# Altium PCB STC32G12k128.PcbDoc
Units mil, origin at the board's own origin, x right, y up, seen from the top; angles counter-clockwise.
Board outline 1653.54 x 1062.99 mil, 4 copper layers (Top Signal, GND, POWER, Bottom Signal), stack 23.756 mil thick; 19 components, 68 nets, 165 pads, 54 vias.
Unrouted connection lines stored in the file: 11.
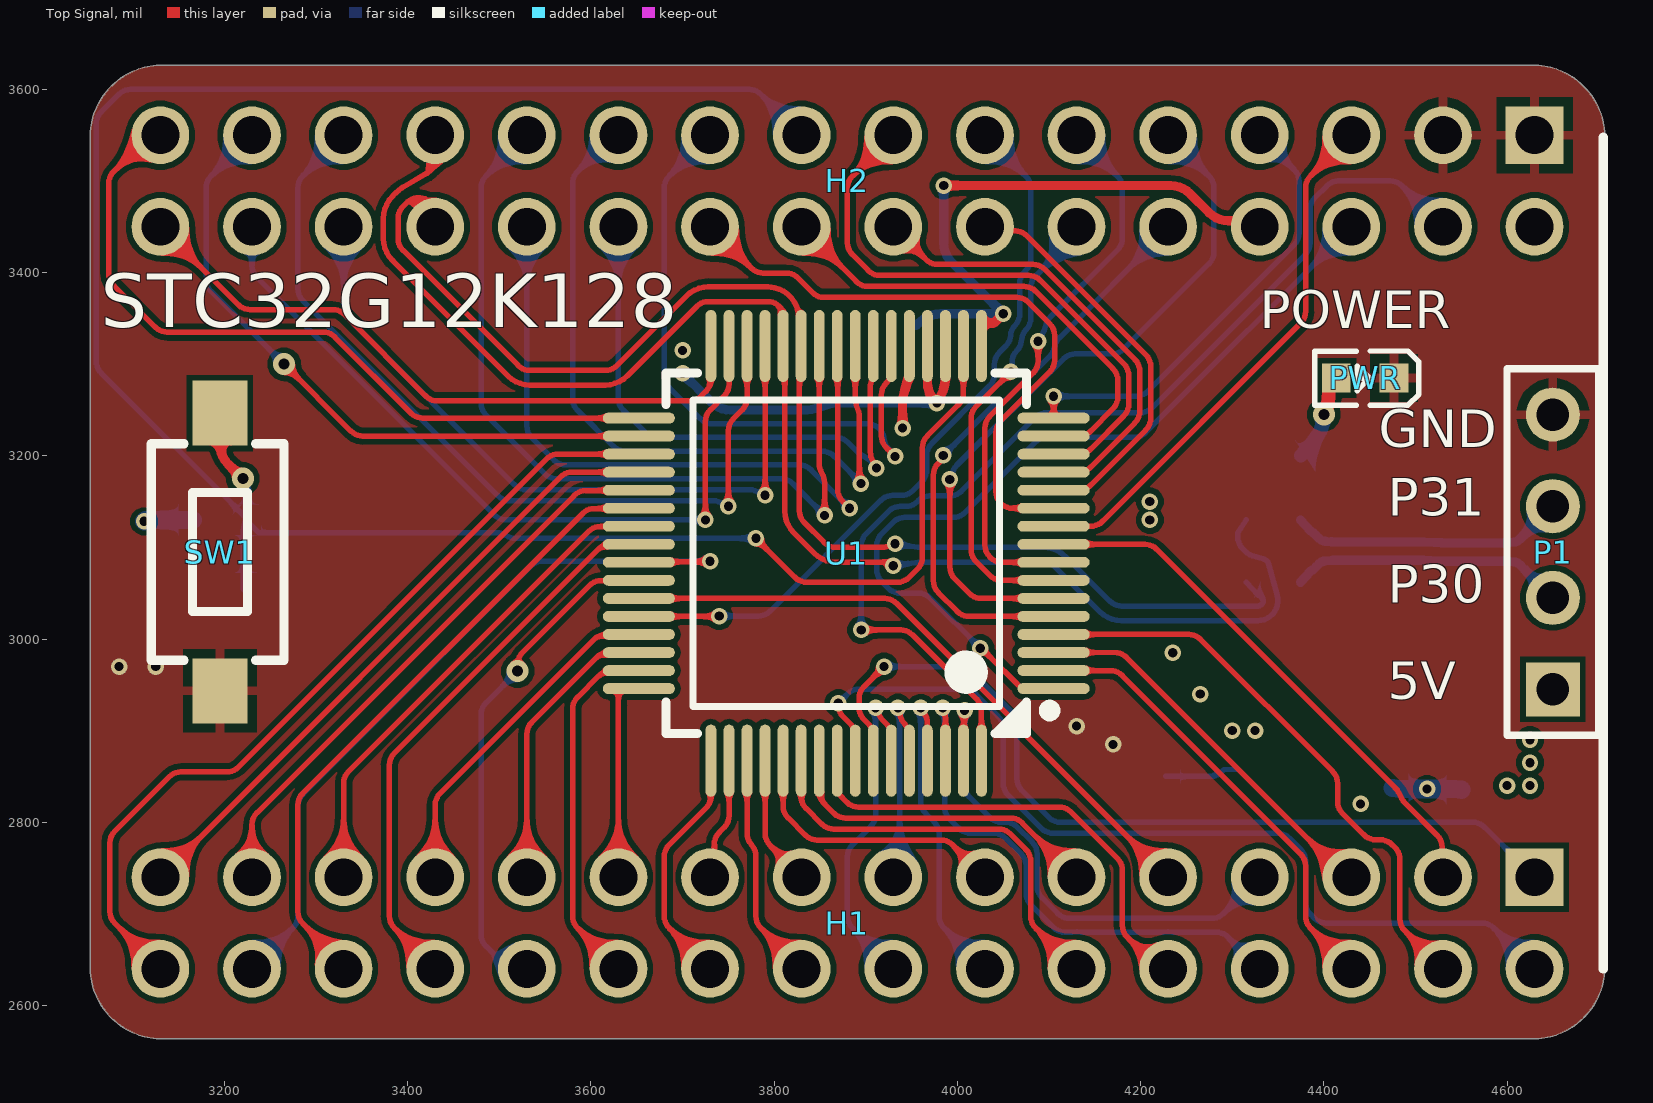
[diagram p0: Top Signal view]
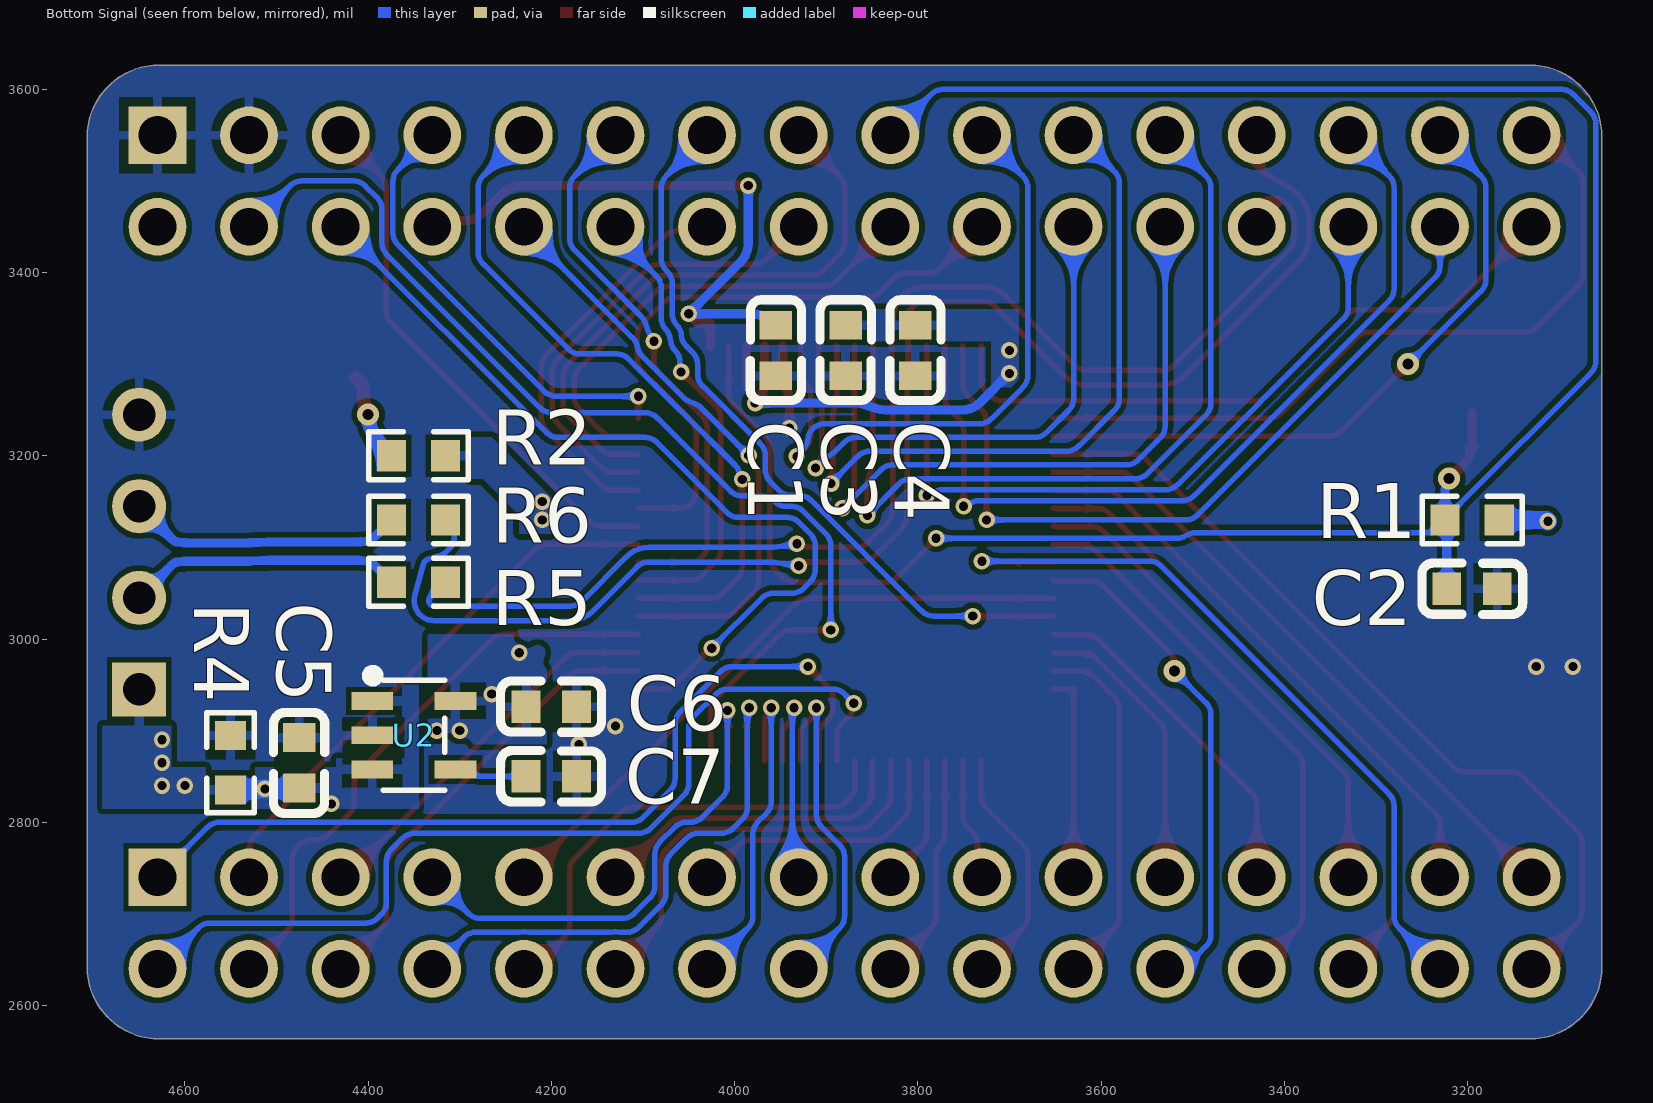
[diagram p1: Bottom Signal view, seen from below]
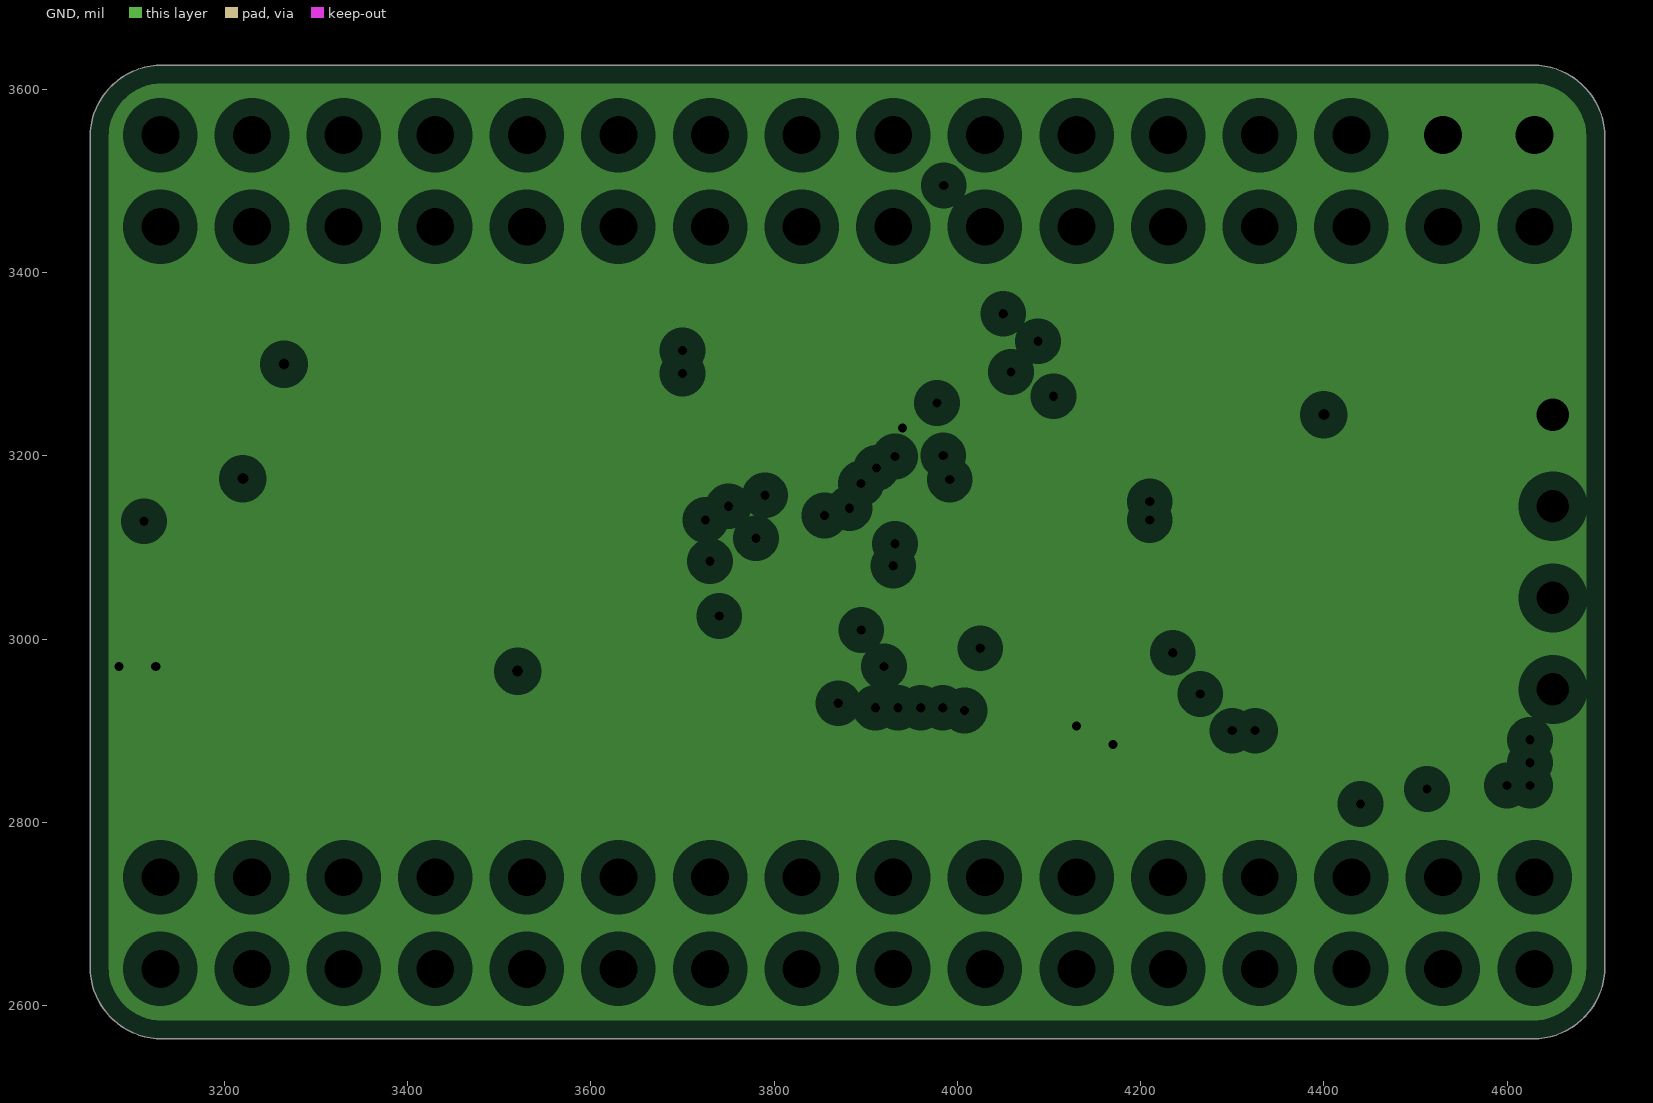
[diagram p2: GND, clearances drawn from the general rule]
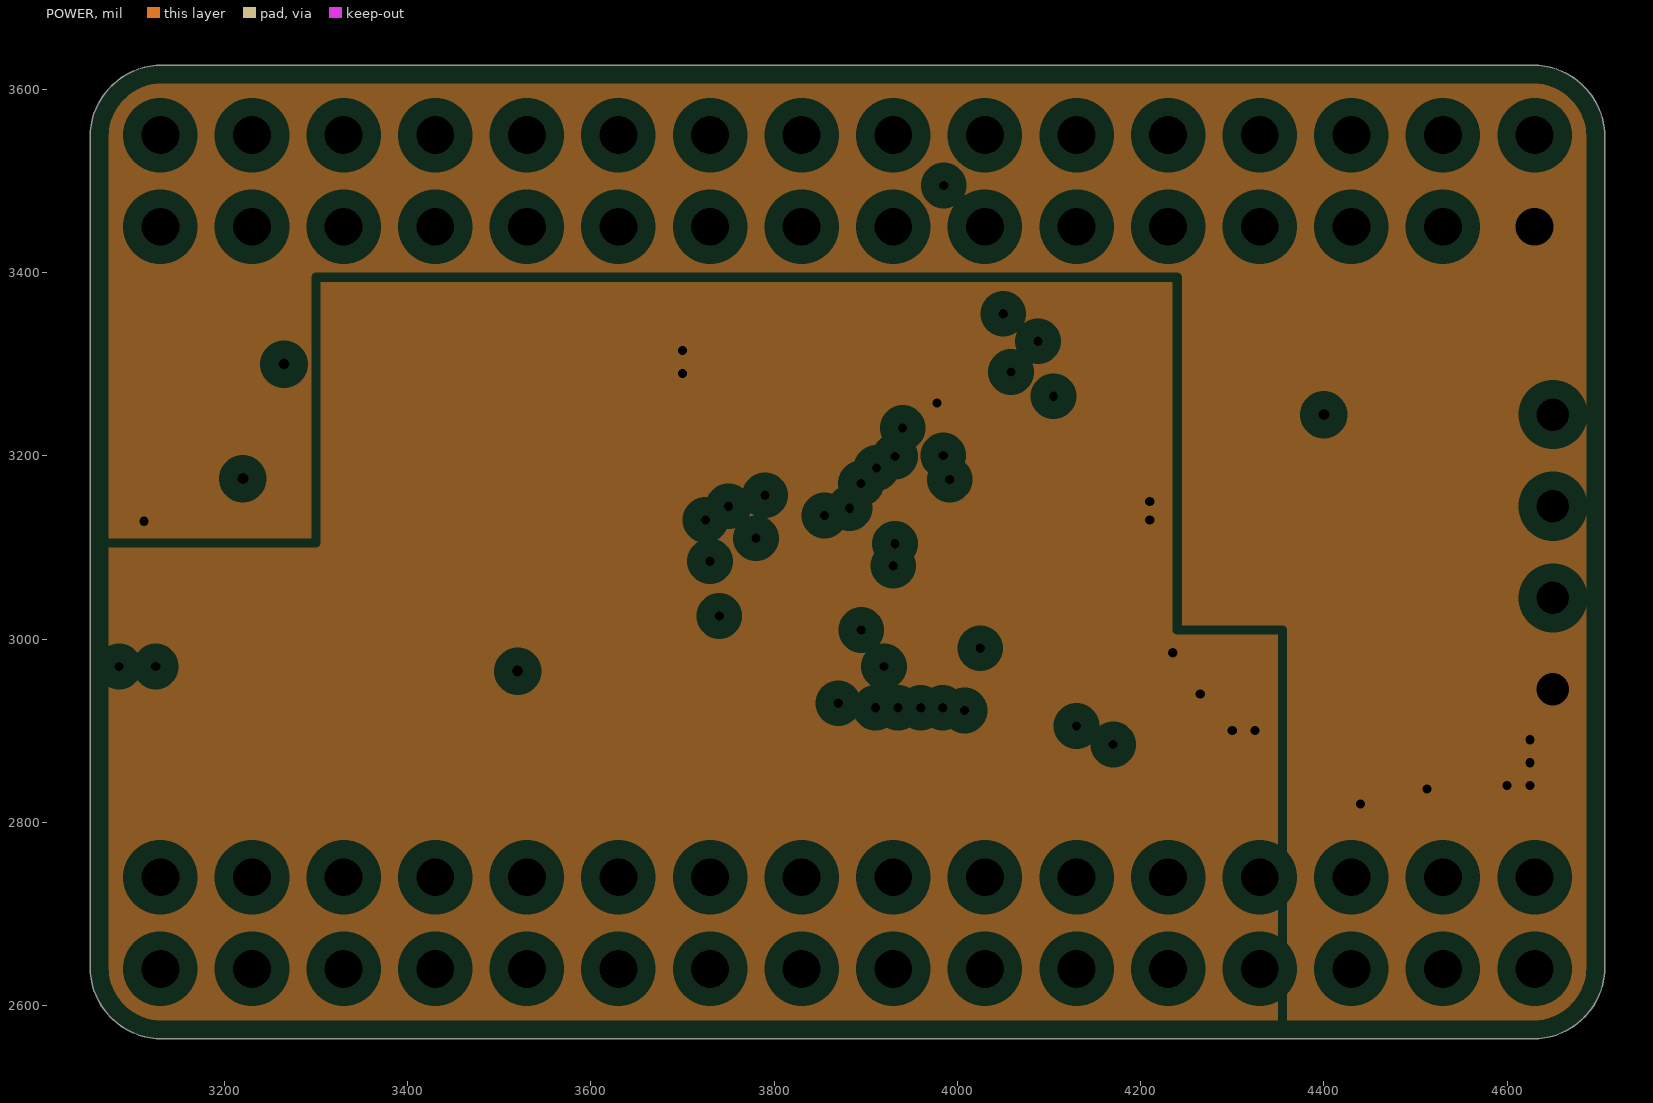
[diagram p3: POWER, clearances drawn from the general rule]

## Layer stack, top to bottom
Top Solder: solder mask 0.4, Solder Resist, Dk 3.5
Top Signal: signal copper 1.4
Dielectric 2: prepreg 2.8, PP-006, Dk 4.1
GND: plane copper 1.378, net GND
Dielectric 1: dielectric 12.6, FR-4, Dk 4.8
POWER: plane copper 1.378, net VCC
Dielectric 3: prepreg 2.8, PP-006, Dk 4.1
Bottom Signal: signal copper 1.4
Bottom Solder: solder mask 0.4, Solder Resist, Dk 3.5

## Board outline
3053.23,2642.24 ccw(c3131.97,2642.24) 3131.97,2563.5 4628.03,2563.5 ccw(c4628.03,2642.24) 4706.77,2642.24 4706.77,3547.76 ccw(c4628.03,3547.76) 4628.03,3626.5 3131.97,3626.5 ccw(c3131.97,3547.76) 3053.23,3547.76

## Design rules (kind name [scope] priority, off if disabled: settings)
Clearance [All] p1: gap=6 ignorepadtopadclearanceinfootprint=FALSE
DiffPairsRouting DiffPair_DiffPairsRouting [All] p1: maxlimit=10 minlimit=1 mostfreqgap=10 toplayer_minwidth=1 toplayer_maxwidth=15 toplayer_prefwidth=8 bottomlayer_minwidth=1 bottomlayer_maxwidth=15 bottomlayer_prefwidth=8 maxuncoupledlength=500
DiffPairsRouting DiffPair_DiffPairsRouting_1 [All] p2: maxlimit=10 minlimit=1 mostfreqgap=10 toplayer_minwidth=0 toplayer_maxwidth=15 toplayer_prefwidth=15 bottomlayer_minwidth=0 bottomlayer_maxwidth=15 bottomlayer_prefwidth=15 maxuncoupledlength=500
DiffPairsRouting DiffPair_DiffPairsRouting_2 [All] p3: maxlimit=10 minlimit=1 mostfreqgap=10 toplayer_minwidth=1 toplayer_maxwidth=15 toplayer_prefwidth=15 bottomlayer_minwidth=1 bottomlayer_maxwidth=15 bottomlayer_prefwidth=15 maxuncoupledlength=500
DiffPairsRouting DiffPair_DiffPairsRouting_3 [All] p4: maxlimit=10 minlimit=1 mostfreqgap=10 toplayer_minwidth=1 toplayer_maxwidth=15 toplayer_prefwidth=10 bottomlayer_minwidth=1 bottomlayer_maxwidth=15 bottomlayer_prefwidth=10 maxuncoupledlength=500
DiffPairsRouting DiffPair_DiffPairsRouting_4 [InDifferentialPair ('USB') Or InDifferentialPair ('USBUSB') Or InDifferentialPair ('NewDifferentialPair1')] p5: maxlimit=10 minlimit=10 mostfreqgap=10 toplayer_minwidth=5 toplayer_maxwidth=15 toplayer_prefwidth=10 bottomlayer_minwidth=5 bottomlayer_maxwidth=15 bottomlayer_prefwidth=10 maxuncoupledlength=500
DiffPairsRouting DiffPair_DiffPairsRouting_5 [All] p6: maxlimit=10 minlimit=10 mostfreqgap=10 toplayer_minwidth=1 toplayer_maxwidth=15 toplayer_prefwidth=10 bottomlayer_minwidth=1 bottomlayer_maxwidth=15 bottomlayer_prefwidth=10 maxuncoupledlength=500
DiffPairsRouting [All] p7: maxlimit=10 minlimit=10 mostfreqgap=10 toplayer_minwidth=15 toplayer_maxwidth=15 toplayer_prefwidth=15 bottomlayer_minwidth=15 bottomlayer_maxwidth=15 bottomlayer_prefwidth=15 maxuncoupledlength=500
HoleToHoleClearance [All] p1: gap=0 allowstackedmicrovias=TRUE
MatchedLengths DiffPair_MatchedLengths [All] p1: tolerance=3000 checknetsindiffpair=FALSE checkdiffpairvsdiffpair=TRUE checkxsignals=TRUE checkothers=TRUE
MatchedLengths DiffPair_MatchedLengths_1 [All] p2: tolerance=3000 checknetsindiffpair=FALSE checkdiffpairvsdiffpair=TRUE checkxsignals=TRUE checkothers=TRUE
MatchedLengths DiffPair_MatchedLengths_2 [All] p3: tolerance=3000 checknetsindiffpair=FALSE checkdiffpairvsdiffpair=TRUE checkxsignals=TRUE checkothers=TRUE
MatchedLengths DiffPair_MatchedLengths_3 [All] p4: tolerance=3000 checknetsindiffpair=FALSE checkdiffpairvsdiffpair=TRUE checkxsignals=TRUE checkothers=TRUE
MatchedLengths DiffPair_MatchedLengths_4 [InDifferentialPair ('USB') Or InDifferentialPair ('USBUSB') Or InDifferentialPair ('NewDifferentialPair1')] p5: tolerance=1000 checknetsindiffpair=FALSE checkdiffpairvsdiffpair=TRUE checkxsignals=TRUE checkothers=TRUE
MatchedLengths DiffPair_MatchedLengths_5 [All] p6: tolerance=1000 checknetsindiffpair=FALSE checkdiffpairvsdiffpair=TRUE checkxsignals=TRUE checkothers=TRUE
MinimumSolderMaskSliver [All] p1: minsoldermaskwidth=0
PlaneClearance [All] p1: clearance=20
PlaneConnect [All] p1: planeconnectstyle=Relief reliefexpansion=20 reliefentries=4 reliefconductorwidth=10 reliefairgap=10
PolygonConnect [All] p1: thpad.connectstyle=Relief thpad.reliefconductorwidth=10 thpad.reliefentries=4 thpad.polygonreliefangle="90 Angle" thpad.airgapwidth=10 smdpad.connectstyle=Relief smdpad.reliefconductorwidth=10 smdpad.reliefentries=4 smdpad.polygonreliefangle="90 Angle" smdpad.airgapwidth=10 via.connectstyle=Direct via.reliefconductorwidth=10 via.reliefentries=4 via.polygonreliefangle="90 Angle" via.airgapwidth=10
RoutingVias [All] p1: holewidth=12 width=24 viastyle="Through Hole" minholewidth=4 minwidth=10 maxholewidth=28 maxwidth=50
SilkToSilkClearance [All] p1: silktosilkclearance=0
SilkToSolderMaskClearance [IsPad] p1: minsilkscreentomaskgap=0 clearancetoexposedcopper=TRUE
SolderMaskExpansion [All] p1: expansion=4 istentingtop=FALSE
UnRoutedNet [All] p1: checkbadconnections=TRUE
Width [All] p1: maxlimit=20 minlimit=5 preferedwidth=10
22 further rules are at their usual default settings.

## Classes and differential pairs
differential pair NewDifferentialPair1: +P30 -P31
differential pair D_USB_: +USB_N -USB_P
differential pair USB: +USB_P -USB_N

## Components (designator, comment, footprint, x,y, rotation, side; value= is the part's Value field where it differs from the comment)
C1 "0.1uF" C0603 3955,3315 r270 bottom value=100nF
C2 "100nF" C0603 3195,3055 r0 bottom
C3 "22uF" C0603 3878.87,3315 r270 bottom value=100nF
C4 "0.1uF" C0603 3802.74,3315 r270 bottom value=100nF
C5 "1uF" C0603 4475.23,2865 r90 bottom value=100nF
C6 "1uF" C0603 4200,2926.13 r180 bottom value=100nF
C7 "22uF" C0603 4200,2850 r180 bottom value=100nF
H1 "X6521WV-2x16H-C60D30" HDR-TH_32P-2.54-V-M-R2-C16-S2.54 3880,2690 r180 top locked
H2 "X6521WV-2x16H-C60D30" HDR-TH_32P-2.54-V-M-R2-C16-S2.54 3880,3500 r180 top locked
P1 "Header 4" HDR1X4 4650,2945 r90 top
PWR "KT-0603R" LED0603-RD 4445,3285 r180 top (schematic designator LED1)
R1 "2.7k" R0603 3195,3130 r180 bottom value=4.7kΩ
R2 "100R" R0603 4345,3200 r0 bottom value=4.7kΩ
R4 "100k" R0603 4550.23,2865 r270 bottom value=4.7kΩ
R5 "22R" R0603 4345,3061.97 r180 bottom value=4.7kΩ
R6 "22R" R0603 4345,3130 r180 bottom value=4.7kΩ
SW1 "TS3625A" KEY-SMD_L6.0-W3.5-LS8.4 3195,3095 r90 top
U1 "STC32G12K128-35I-LQFP64" LQFP-64_L10.0-W10.0-P0.50-LS12.0-BL 3878.63,3093.58 r90 top locked
U2 "RT9013-33GB" SOT-23-5_L3.0-W1.7-P0.95-LS2.8-BL 4350,2895 r270 bottom

## Footprints (in the part's own frame and the unit in brackets; to place one, negate y for a bottom-side part, rotate by r counter-clockwise, add the part's x,y. Pads: shape width x height; smd on the part's side, far side on the other; paste and mask are expansions set on the pad)
C0603 [mm]
  rect 0.8x0.9 smd: 1(-0.7,0) 2(0.7,0)
  silkscreen extent -1.41,-0.71 1.39,0.72
HDR1X4 [mm] "Connector; Header; 4 Position"
  rect 1.5x1.5 hole 0.9: 1(0,0)
  round 1.5 hole 0.9: 2(2.54,0) 3(5.08,0) 4(7.62,0)
  silkscreen extent -1.27,-1.27 8.89,1.27
HDR-TH_32P-2.54-V-M-R2-C16-S2.54 [mm]
  rect 1.6x1.6 hole 1.05: 1(-19.05,-1.27)
  round 1.6 hole 1.05: 2(-19.05,1.27) 3(-16.51,-1.27) 4(-16.51,1.27) 5(-13.97,-1.27) 6(-13.97,1.27) 7(-11.43,-1.27) 8(-11.43,1.27) 9(-8.89,-1.27) 10(-8.89,1.27) 11(-6.35,-1.27) 12(-6.35,1.27) 13(-3.81,-1.27) 14(-3.81,1.27) 15(-1.27,-1.27) 16(-1.27,1.27) 17(1.27,-1.27) 18(1.27,1.27) 19(3.81,-1.27) 20(3.81,1.27) 21(6.35,-1.27) 22(6.35,1.27) 23(8.89,-1.27) 24(8.89,1.27) 25(11.43,-1.27) 26(11.43,1.27) 27(13.97,-1.27) 28(13.97,1.27) 29(16.51,-1.27) 30(16.51,1.27) 31(19.05,-1.27) 32(19.05,1.27)
KEY-SMD_L6.0-W3.5-LS8.4 [mm]
  rect 1.8x1.524 smd: 1(-3.85,0) 2(3.85,0)
  silkscreen extent -3,-1.78 3,1.91
LED0603-RD [mm]
  rect 0.8x0.8 smd: 1(-0.799,0) 2(0.799,0)
  silkscreen extent -1.49,-0.75 1.39,0.76
LQFP-64_L10.0-W10.0-P0.50-LS12.0-BL [mm]
  oval 0.3x2 smd: 1(-3.75,-5.75) 2(-3.25,-5.75) 3(-2.75,-5.75) 4(-2.25,-5.75) 5(-1.75,-5.75) 6(-1.25,-5.75) 7(-0.75,-5.75) 8(-0.25,-5.75) 9(0.25,-5.75) 10(0.75,-5.75) 11(1.25,-5.75) 12(1.75,-5.75) 13(2.25,-5.75) 14(2.75,-5.75) 15(3.25,-5.75) 16(3.75,-5.75) 33(3.75,5.75) 34(3.25,5.75) 35(2.75,5.75) 36(2.25,5.75) 37(1.75,5.75) 38(1.25,5.75) 39(0.75,5.75) 40(0.25,5.75) 41(-0.25,5.75) 42(-0.75,5.75) 43(-1.25,5.75) 44(-1.75,5.75) 45(-2.25,5.75) 46(-2.75,5.75) 47(-3.25,5.75) 48(-3.75,5.75)
  oval 2x0.3 smd: 17(5.75,-3.75) 18(5.75,-3.25) 19(5.75,-2.75) 20(5.75,-2.25) 21(5.75,-1.75) 22(5.75,-1.25) 23(5.75,-0.75) 24(5.75,-0.25) 25(5.75,0.25) 26(5.75,0.75) 27(5.75,1.25) 28(5.75,1.75) 29(5.75,2.25) 30(5.75,2.75) 31(5.75,3.25) 32(5.75,3.75) 49(-5.75,3.75) 50(-5.75,3.25) 51(-5.75,2.75) 52(-5.75,2.25) 53(-5.75,1.75) 54(-5.75,1.25) 55(-5.75,0.75) 56(-5.75,0.25) 57(-5.75,-0.25) 58(-5.75,-0.75) 59(-5.75,-1.25) 60(-5.75,-1.75) 61(-5.75,-2.25) 62(-5.75,-2.75) 63(-5.75,-3.25) 64(-5.75,-3.75)
  silkscreen extent -5,-5.79 5,5
R0603 [mil]
  rect 31.75x34.02 smd paste-3937.01 mask+2: 1(-29.66,0) 2(29.66,0)
  silkscreen extent -55,-26 55,26
SOT-23-5_L3.0-W1.7-P0.95-LS2.8-BL [mm]
  rect 0.49x1.157 smd: 1(-0.95,-1.154) 2(0,-1.154) 3(0.95,-1.154)
  rect 0.49x1.175 smd: 4(0.95,1.154) 5(-0.95,1.154)
  silkscreen extent -1.8,-1.29 1.53,0.85

## Part data
C1 C2 C3 C4 C5 C6 C7: library part CC0603KRX7R9BB104, JLCPCB Part Class="Basic Part", LCSC Part Name="100nF ±10% 50V", Manufacturer=YAGEO(国巨), Temperature Coefficient=X7R, Tolerance=±10%, Voltage Rated=50V, Add into BOM=yes, Convert to PCB=yes, Datasheet=https://atta.szlcsc.com/upload/public/pdf/source/20180910/C282072_33301C7F631E79921B82A8DAC6BCC5B3.pdf, Device=CC0603KRX7R9BB104, Manufacturer Part=CC0603KRX7R9BB104, Supplier=LCSC, Supplier Footprint=0603, Supplier Part=C14663, Symbol=CC0603KRX7R9BB104
H1 H2: Color=黑色, Current Rating (Max)=3A, JLCPCB Part Class="Extended Part", LCSC Part Name="2x16P 间距:2.54mm 方针", Manufacturer="XKB Connection(中国星坤)", Operating Temperature Range=-40℃~+105℃, Soldering Temperature(Max)=260℃, Voltage Rating (Max)=250V, Add into BOM=yes, Circluar Pins/Square Pins=方针, Contact Material=黄铜, Contact Plating=金, Convert to PCB=yes, Datasheet=https://atta.szlcsc.com/upload/public/pdf/source/20211009/DE33EBA4104B5B447A7BD8383FBBA145.pdf, Device=X6521WV-2x16H-C60D30, Insulation Height=2.5mm, Length of End Connection Pin=-, Length of Mating Pin=-, Manufacturer Part=X6521WV-2x16H-C60D30, Mounting Type=-, Number of Pins=32P, Number of Rows=双排, Pin Structure=2x16P, Pitch=2.54mm, Row Spacing=2.54mm, Supplier=LCSC, Supplier Footprint=插件,P=2.54mm, Supplier Part=C725888, Symbol=X6521WV-2×16H-C30D60
P1: "Header, 4-Pin", LatestRevisionDate=17-Jul-2002, LatestRevisionNote="Re-released for DXP Platform.", Publisher="Altium Limited"
PWR: Color Temperature=-, Emitted Color=红色, JLCPCB Part Class="Basic Part", LCSC Part Name="0603 红灯 高亮", Manufacturer=KENTO, Operating Temperature=-40℃~+85℃, Add into BOM=yes, Convert to PCB=yes, Datasheet=https://atta.szlcsc.com/upload/public/pdf/source/20160616/1466072038404.pdf, Device=KT-0603R, Diode Configuration=-, Dominant Wavelength=-, Forward Current=-, Lens Color=-, Manufacturer Part=KT-0603R, Mounting Sytle=-, Peak Wavelength=-, Power Dissipation=-, Supplier=LCSC, Supplier Footprint=0603, Supplier Part=C2286, Symbol=KT-0603R, Viewing Angle=-
R1 R2 R4 R5 R6: library part RC0603FR-074K7L, JLCPCB Part Class="Extended Part", LCSC Part Name="厚膜电阻 4.7kΩ ±1% 100mW", Manufacturer=YAGEO(国巨), Operating Temperature Range=-55℃~+155℃, Overload Voltage (Max)=75V, Power(Watts)=100mW, Temperature Coefficient=±100ppm/℃, Tolerance=±1%, Add into BOM=yes, Convert to PCB=yes, Datasheet=https://atta.szlcsc.com/upload/public/pdf/source/20180224/C181757_15194369480721363983.pdf, Device=RC0603FR-074K7L, Manufacturer Part=RC0603FR-074K7L, Supplier=LCSC, Supplier Footprint=0603, Supplier Part=C99782, Symbol=RC0603FR-074K7L, Type=厚膜电阻
SW1: Contact Current=50mA, JLCPCB Part Class="Extended Part", LCSC Part Name="6.1*3.65*2.5mm 立贴 轻触开关", Manufacturer="SHOU HAN(首韩)", Operating Force=250gf, Voltage Rating (DC)=12V, Actuator Style=矩形按钮, Add into BOM=yes, Circuit=单刀单掷, Convert to PCB=yes, Datasheet=https://atta.szlcsc.com/upload/public/pdf/source/20190620/C398053_EFFFB524A3F966B1F45EE8333D1EDECC.pdf, Device=TS3625A, Manufacturer Part=TS3625A, Mechanical Life=-, Mounting Style=立贴, Supplier=LCSC, Supplier Footprint=SMD, Supplier Part=C398053, Switch Height=2.5mm, Switch Length=6.1mm, Switch Width=3.65mm, Symbol=TS3625A, With Lamp=-
U1: JLCPCB Part Class="Extended Part", Manufacturer=STC(宏晶), Add into BOM=yes, Convert to PCB=yes, Datasheet=https://atta.szlcsc.com/upload/public/pdf/source/20230914/AA8E7D278420EC7FE3821FDFD9AB7FC5.pdf, Device=STC32G12K128-35I-LQFP64, LCSC Part Name=STC32G12K128-35I-LQFP64, Manufacturer Part=STC32G12K128-35I-LQFP64, Supplier=LCSC, Supplier Footprint=LQFP-64, Supplier Part=C5210761, Symbol=STC32G12K128-35I-LQFP64
U2: Dropout Voltage=400mV@(500mA), JLCPCB Part Class="Extended Part", LCSC Part Name="输入5.5V 输出3.3V 500mA", Manufacturer=RICHTEK(立锜), MAX Output Current=500mA, Maximum Input Voltage=5.5V, Operating Temperature=-40℃~+85℃, Output Voltage=3.3V, Power Supply Rejection Ratio (PSRR)=50dB@(10kHz), standby current=50uA, Add into BOM=yes, Convert to PCB=yes, Datasheet=https://atta.szlcsc.com/upload/public/pdf/source/20150504/1457707282459.pdf, Device=RT9013-33GB, Feature=-, Manufacturer Part=RT9013-33GB, Noise=-, Number of Outputs=1, Output Polarity=正极, Output Type=固定, Supplier=LCSC, Supplier Footprint=SOT-23-5, Supplier Part=C47773, Symbol=RT9013-33GB

## Via types
v1: diameter 18, hole 10, Top Signal to Bottom Signal, tented both sides, 50 vias
v2: diameter 24, hole 12, Top Signal to Bottom Signal, tented both sides, 4 vias

## Nets (pads, with @x,y where several pads share a name; then routed paths per layer and width w, separated by ;. In a path a pad name is that pad's centre, name@x,y a point inside that pad or via, vN(x,y) a via of type N, cw(c..) or ccw(c..) an arc to the next point about the centre after c; other vN are vias at no path point)
5V: C5.1 H2.2 P1.1 R1.2 R4.2 U2.1 U2.3 | length 128.8
  Bottom Signal w20: v1(3112.28,3128.5) 3113.79,3130 R1.2 ; C5.1 4482.95,2836.39 4543.22,2836.39 R4.2
  other v1: 4440,2820 4512.73,2836.39 4600,2840 4625,2840 4625,2865 4625,2890
GND: C1.2 C2.1 C3.2 C4.2 C5.2 C6.2 C7.2 H2.1 H2.3 P1.4 PWR.1 R4.1 SW1.1 U1.21 U2.2 | length 90.7
  Top Signal w10: v1(3940.23,3230.23) 3940.23,3259.44 cw(c3970.23,3259.44) 3941.61,3268.44 3945.82,3281.95 ccw(c3917.18,3290.91) 3947.18,3290.91 3947.18,3315.06 cw(c3977.18,3315.06) 3947.53,3319.59 U1.21
  other v1: 4170,2885 4130,2905 3085,2970 3125,2970
NetC7_1: C7.1 U2.4 | length 79.4
  Bottom Signal w6: C7.1 4276.04,2850 ccw(c4276.04,2868) 4288.77,2855.27 4291.1,2857.6 U2.4
NetLED1_2: PWR.2 R2.2 | length 97.4
  Top Signal w15: v2(4400,3245) ccw(c4360.28,3266.14) 4405.28,3266.05 4405.28,3276.75 PWR.2
  Bottom Signal w15: R2.2 4383.04,3209.51 4386.26,3212.74 ccw(c4354.43,3244.54) 4398.93,3237.87 4399.91,3244.44 cw(c4444.43,3237.84) v2(4400,3245)
P0: H1.16 U1.59 | length 379.6
  Top Signal w6: v1(3910.68,2925) 3910.72,2924.94 cw(c3894.99,2916.17) 3911.26,2923.87 3914.59,2916.85 ccw(c3930.89,2924.48) 3918.12,2911.8 3922.59,2907.32 cw(c3909.84,2894.62) 3924.18,2905.5 3927.84,2900.67 U1.59
  Bottom Signal w6: v1(3910.68,2925) 3910.68,2808.14 cw(c3892.68,2808.14) 3905.43,2795.43 3885.25,2775.25 ccw(c3898,2762.54) 3880,2762.54 3880,2697.46 ccw(c3898,2697.46) 3885.25,2684.75 H1.16
P1: H1.15 U1.60 | length 248.3
  Top Signal w6: v1@3935.06,2925 cw(c3919.33,2916.24) 3937,2919.68 3937.65,2916.34 ccw(c3955.33,2919.72) 3942.31,2907.29 3942.6,2906.99 cw(c3929.53,2894.61) 3943.86,2905.5 3947.53,2900.67 U1.60
  Bottom Signal w6: H1.15 cw(c3947.61,2736.27) 3932.93,2746.68 3933.7,2747.8 ccw(c3919,2758.18) 3937,2758.18 3937,2916.87 ccw(c3919,2916.87) v1(3935.04,2925.04)
P2: H1.14 U1.61 | length 371.3
  Top Signal w6: v1(3960,2925) ccw(c3976.81,2931.44) 3962.16,2920.98 3963.89,2918.54 cw(c3949.21,2908.12) 3967.21,2908.12 U1.61
  Bottom Signal w6: v1(3960,2925) 3960,2822.46 ccw(c3978,2822.46) 3965.25,2809.75 3974.75,2800.25 cw(c3962,2787.54) 3980,2787.54 3980,2697.46 ccw(c3998,2697.46) 3985.25,2684.75 H1.14
P3: H1.8 U1.62 | length 609.5
  Top Signal w6: v1(3984,2925) 3984.02,2924.92 ccw(c4001.44,2929.47) 3984.08,2924.7 3986.27,2916.69 cw(c3968.9,2911.95) 3986.9,2911.95 U1.62
  Bottom Signal w6: v1(3984,2925) cw(c3968.11,2916.55) 3986.11,2916.55 3986.11,2816.35 ccw(c4004.11,2816.35) 3991.36,2803.64 4001.75,2793.25 ccw(c4014.46,2806) 4014.46,2788 4039.54,2788 cw(c4039.54,2770) 4052.25,2782.75 4069.75,2765.25 cw(c4057,2752.54) 4075,2752.54 4075,2722.46 ccw(c4093,2722.46) 4080.25,2709.75 4104.75,2685.25 ccw(c4117.46,2698) 4117.46,2680 4122.46,2680 ccw(c4122.4,2698) 4124.73,2680.15 cw(c4130,2640) 4135.26,2680.15 4135.31,2680.15 ccw(c4137.6,2698) 4137.54,2680 4222.46,2680 ccw(c4222.4,2698) 4224.73,2680.15 cw(c4230,2640) 4235.26,2680.15 4235.31,2680.15 ccw(c4237.6,2698) 4237.54,2680 4282.54,2680 cw(c4282.54,2662) 4295.25,2674.75 H1.8
P4: H1.7 U1.63 | length 566.2
  Top Signal w6: U1.63 4006.58,2867.84 ccw(c3989.21,2872.54) 4007.21,2872.48 4007.21,2917.46 cw(c4025.21,2917.46) v1(4007.83,2922.17)
  Bottom Signal w6: v1(4007.83,2922.17) 4007.83,2840.29 ccw(c4025.83,2840.29) 4013.08,2827.58 4035.42,2805.25 ccw(c4048.12,2818) 4048.12,2800 4052.54,2800 cw(c4052.54,2782) 4065.25,2794.75 4081.75,2778.25 cw(c4069,2765.54) 4087,2765.54 4087,2730.46 ccw(c4105,2730.46) 4092.25,2717.75 4109.75,2700.25 ccw(c4122.46,2713) 4122.46,2695 4277.54,2695 ccw(c4277.54,2713) 4290.25,2700.25 H1.7
P5: H1.6 U1.2 | length 498.6
  Top Signal w6: U1.2 4166.91,2965.63 cw(c4166.91,2947.63) 4179.67,2960.33 4374.73,2765.27 cw(c4362,2752.54) 4380,2752.54 4380,2697.46 ccw(c4398,2697.46) 4382.63,2688.09 ccw(c4398,2697.46) 4385.25,2684.75 H1.6
P6: H1.5 U1.3 | length 425.1
  Top Signal w6: U1.3 4171.78,2985.31 cw(c4171.78,2967.31) 4184.51,2980.04 4419.32,2745.23 ccw(c4432.13,2757.87) H1.5
P7: H1.4 U1.4 | length 638.1
  Top Signal w6: U1.4 4252.54,3005 cw(c4252.54,2987) 4265.3,2999.7 4409.73,2855.27 cw(c4397,2842.54) 4415,2842.42 4415,2822.52 ccw(c4433,2822.46) 4420.25,2809.75 4443.81,2786.19 ccw(c4456.52,2798.94) 4456.52,2780.94 4461.6,2780.94 cw(c4461.6,2762.94) 4474.36,2775.64 4477.66,2772.34 cw(c4464.93,2759.61) 4482.93,2759.48 4482.93,2694.58 ccw(c4500.93,2694.52) 4488.18,2681.82 H1.4
P10: H1.3 U1.9 | length 599.1
  Top Signal w6: U1.9 4204.58,3103.42 cw(c4204.58,3085.42) 4217.33,3098.12 4478.08,2837.38 cw(c4465.35,2824.65) 4481.29,2833.01 4485.2,2825.55 ccw(c4501.2,2833.8) 4488.48,2821.07 4523.78,2785.77 cw(c4511.05,2773.04) 4529.05,2773.04 4529.05,2745.78 ccw(c4547.05,2745.78) H1.3
P11: H2.5 U1.10 | length 587.4
  Top Signal w6: U1.10 4145.65,3123.11 ccw(c4145.65,3141.11) 4158.35,3128.35 4374.75,3344.75 ccw(c4362,3357.46) 4380,3357.46 4380,3492.54 cw(c4398,3492.54) 4385.24,3505.24 H2.5
P13: H2.7 U1.16 | length 492.3
  Top Signal w6: U1.16 v1(4105,3265)
  Bottom Signal w6: v1(4105,3265) 4194.81,3265 ccw(c4194.81,3283) 4207.52,3270.25 4367.75,3430.48 ccw(c4355,3443.19) 4373,3443.19 4373,3499.54 ccw(c4355,3499.54) 4367.73,3512.27 H2.7
P14: H2.14 U1.12 | length 444.4
  Top Signal w6: H2.14 4030.06,3449.95 ccw(c4042,3463.42) 4042,3445.42 4063.04,3445.42 cw(c4063.04,3427.42) 4075.79,3440.12 4205.73,3310.18 cw(c4193,3297.46) 4211,3297.46 4211,3241.07 cw(c4193,3241.07) 4205.75,3228.37 4145.11,3167.73 cw(c4132.41,3180.48) 4143.29,3166.14 4138.46,3162.48 U1.12
P15: H2.16 U1.13 | length 504.8
  Top Signal w6: H2.16 3965.75,3414.25 ccw(c3978.46,3427) 3978.46,3409 4082.49,3409 cw(c4082.49,3391) 4095.24,3403.7 4193.73,3305.21 cw(c4181,3292.49) 4199,3292.49 4199,3248.76 cw(c4181,3248.76) 4193.75,3236.06 4145.1,3187.41 cw(c4132.4,3200.16) 4143.31,3185.85 4138.46,3182.16 U1.13
P16: H2.15 U1.14 | length 649.1
  Top Signal w6: H2.15 3885.25,3505.25 ccw(c3898,3492.54) 3880,3492.54 3880,3432.46 ccw(c3898,3432.46) 3885.25,3419.75 3902.78,3402.22 ccw(c3915.46,3415) 3915.46,3397 4077.51,3397 cw(c4077.51,3379) 4090.2,3391.77 4181.73,3300.24 cw(c4169,3287.51) 4187,3287.51 4187,3264.13 4187,3256.44 cw(c4169,3256.44) 4181.75,3243.74 4145.11,3207.1 cw(c4132.41,3219.85) 4143.29,3205.51 4138.46,3201.85 U1.14
P17: H2.18 U1.15 | length 525.7
  Top Signal w6: H2.18 3889.75,3390.25 ccw(c3902.46,3403) 3902.46,3385 4072.54,3385 cw(c4072.54,3367) 4085.3,3379.7 4169.73,3295.27 cw(c4157,3282.54) 4175,3282.54 4175,3264.13 cw(c4157,3264.13) 4169.75,3251.43 4145.09,3226.77 cw(c4132.4,3239.53) 4143.28,3225.19 4138.46,3221.53 U1.15
P20: H1.25 U1.45 | length 380.9
  Top Signal w6: H1.25 3430,2818.85 cw(c3448,2818.85) 3435.25,2831.56 3603.1,2999.41 cw(c3615.8,2986.65) 3615.8,3004.65 3648.4,3004.65 ccw(c3648.4,3022.65) 3651.89,3005 U1.45
P21: H1.23 U1.46 | length 318.1
  Top Signal w6: H1.23 3530,2896.22 cw(c3548,2896.22) 3535.25,2908.93 3606.04,2979.72 cw(c3618.74,2966.96) 3618.74,2984.96 3648.4,2984.96 ccw(c3648.4,3002.96) 3651.89,2985.31 U1.46
P22: H1.22 U1.47 | length 395.9
  Top Signal w6: H1.22 3585.25,2684.75 cw(c3598,2697.46) 3580,2697.46 3580,2923.6 cw(c3598,2923.6) 3585.25,2936.3 3608.98,2960.03 cw(c3621.69,2947.28) 3621.69,2965.28 3648.4,2965.28 ccw(c3648.4,2983.28) 3651.89,2965.63 U1.47
P23: H1.21 U1.48 | length 228.2
  Top Signal w6: H1.21 3630,2927.94 ; 3630,2927.98 3630.04,2945.88 ccw(c3612.04,2945.96) 3630.04,2945.94 U1.48
P24: H1.20 U1.49 | length 266.7
  Top Signal w6: H1.20 3685.25,2684.75 cw(c3698,2697.46) 3680,2697.46 3680,2762.54 cw(c3698,2762.54) 3685.25,2775.25 3725.74,2815.74 ccw(c3712.99,2828.45) 3730.99,2828.45 U1.49
P25: H1.19 U1.50 | length 133.5
  Top Signal w6: H1.19 ccw(c3716.61,2752.03) 3734.61,2751.97 3734.61,2776.04 cw(c3752.61,2776.04) 3739.86,2788.74 3745.43,2794.32 ccw(c3732.68,2807.02) 3750.68,2807.02 U1.50
P26: H1.18 U1.51 | length 249.6
  Top Signal w6: U1.51 3770.36,2787.82 ccw(c3788.36,2787.82) 3774.8,2775.97 3775.6,2775.06 cw(c3762,2763.26) 3780,2763.26 3780,2697.46 ccw(c3798,2697.46) 3785.25,2684.75 H1.18
P27: H1.17 U1.52 | length 142.9
  Top Signal w6: U1.52 3790.05,2787.92 ccw(c3808.05,2787.92) 3795.34,2775.18 3827.7,2742.82 cw(c3814.97,2730.09) H1.17
P30: H2.26 R5.2 U1.27 | length 1446.5
  Top Signal w6: H2.26 3430,3463.81 ccw(c3412,3463.81) 3399.3,3476.57 3394.75,3472.02 ccw(c3407.5,3459.32) 3389.5,3459.32 3389.5,3437.16 ccw(c3407.5,3437.16) 3394.75,3424.46 3520.67,3298.54 ccw(c3533.38,3311.29) 3533.38,3293.29 3615.59,3293.29 ccw(c3615.59,3311.29) 3628.29,3298.54 3704.16,3374.4 cw(c3728.16,3350.32) 3728.16,3384.32 3792.84,3384.32 cw(c3792.84,3350.32) 3800.25,3383.5 cw(c3792.84,3350.32) 3826.79,3352.25 3828.32,3326.29 ccw(c3846.28,3327.39) 3829.42,3321.1 3829.42,3318.84 ccw(c3846.29,3312.55) 3828.29,3312.97 3827.58,3276.53 ccw(c3845.57,3276.18) 3827.58,3276.18 3827.57,3139.88 ccw(c3845.57,3139.88) 3832.82,3127.18 3854.75,3105.25 ccw(c3867.46,3118) 3867.46,3100 3917.69,3100 ccw(c3917.69,3118) 3922.31,3100.6 3924.47,3101.18 ccw(c3919.91,3118.59) 3926.6,3101.88 v1(3931.88,3104)
  Bottom Signal w6: v1(3931.88,3104) ccw(c3937.8,3121) 3935.37,3103.16 3957.4,3100.16 ccw(c3959.83,3118) 3959.83,3100 4093.79,3100 cw(c4093.79,3066) 4117.9,3089.98 4166.66,3041.21 ccw(c4179.37,3053.97) 4179.37,3035.97 4298.72,3035.97 4327.77,3035.98 ccw(c4327.77,3041.98) R5.2@4328.25,3047.96 ; R5.2 R5.2@4328.22,3047.97
P31: H2.25 R6.2 U1.28 | length 1619.9
  Top Signal w6: 3383.47,3483.36 ccw(c3407.5,3459.32) 3373.5,3459.32 3373.5,3437.16 ccw(c3407.5,3437.16) 3383.38,3413.2 3509.37,3287.21 3509.41,3287.17 ccw(c3533.38,3311.29) 3533.38,3277.29 3615.59,3277.29 ccw(c3615.59,3311.29) 3639.6,3287.21 3715.46,3363.07 cw(c3728.16,3350.32) 3728.16,3368.32 3792.84,3368.32 cw(c3792.84,3350.32) 3810.84,3350.32 3810.84,3327.29 cw(c3792.84,3327.34) 3809.73,3321.11 3809.73,3318.7 cw(c3792.87,3312.46) 3810.86,3312.81 3811.57,3276.53 cw(c3793.57,3276.18) 3811.57,3276.18 3811.57,3139.88 ccw(c3845.57,3139.88) 3821.46,3115.92 3843.49,3093.88 ccw(c3867.46,3118) 3867.46,3084 3917.69,3084 cw(c3917.69,3066) 3922.29,3083.4 3925.19,3082.63 cw(c3923.69,3076.82) 3926.82,3081.94 v1(3930,3080) ; 3383.49,3483.39 3388,3487.9 cw(c3412,3463.81) 3392.76,3491.85 cw(c3412,3463.81) 3394.75,3493.11 3421.13,3508.65 ccw(c3412,3524.16) 3430,3524.16 H2.25
  Bottom Signal w6: v1(3930,3080) 3957.73,3083.83 cw(c3960.2,3066) 3960.2,3084 4093.79,3084 cw(c4093.79,3066) 4106.56,3078.69 4155.32,3029.92 ccw(c4179.37,3053.97) 4179.37,3019.97 4298.72,3019.97 4327.63,3019.98 ccw(c4327.77,3041.98) 4349,3047.73 4339.9,3081.33 ccw(c4331.22,3078.98) 4333.75,3087.62 4322.04,3091.05 cw(c4327.1,3108.32) 4314.4,3095.57 4311.26,3098.7 cw(c4324.04,3111.39) 4306.04,3111.39 4306.04,3115.99 R6.2
P32: H2.28 U1.29 | length 797.2
  Top Signal w6: v1(3790,3157) 3790,3177.05 cw(c3808,3177.05) 3790,3177.29 3790.02,3178.64 ccw(c3772.03,3178.92) 3790.03,3178.92 U1.29@3790.03,3319.03 ; U1.29@3790.03,3319.03 cw(c3808.03,3318.98) U1.29@3790.05,3319.92
  Bottom Signal w6: H2.28 3330,3362.46 ccw(c3348,3362.46) 3335.25,3349.75 3516.75,3168.25 ccw(c3529.46,3181) 3529.46,3163 3773.3,3163 cw(c3773.3,3145) 3781.72,3160.91 3786.4,3158.45 ccw(c3794.88,3174.32) 3789.95,3157.01 v1(3790,3157)
P33: H2.27 U1.30 | length 939.2
  Top Signal w6: v1(3750,3145) 3750,3227.54 cw(c3768,3227.54) 3755.25,3240.25 3765.11,3250.11 ccw(c3752.36,3262.82) 3770.36,3262.82 U1.30
  Bottom Signal w6: H2.27 3285.24,3505.24 ccw(c3298,3492.54) 3280,3492.54 3280,3382.46 ccw(c3298,3382.46) 3285.25,3369.75 3498.75,3156.25 ccw(c3511.46,3169) 3511.46,3151 3733.3,3151 cw(c3733.3,3133) 3741.7,3148.92 3746.4,3146.45 ccw(c3754.88,3162.32) 3749.95,3145.01 v1(3750,3145)
P34: H2.30 U1.31 | length 854.3
  Top Signal w6: v1(3725,3130) 3725,3237.54 cw(c3743,3237.54) 3730.25,3250.25 3745.43,3265.43 ccw(c3732.68,3278.14) 3750.68,3278.14 U1.31
  Bottom Signal w6: H2.30 3230,3407.46 ccw(c3248,3407.46) 3235.25,3394.75 3494.75,3135.25 ccw(c3507.46,3148) 3507.46,3130 v1(3725,3130)
P35: H2.29 U1.34 | length 723.4
  Top Signal w6: v2(3265,3300) 3338.25,3226.75 ccw(c3350.93,3239.53) 3350.93,3221.53 U1.34
  Bottom Signal w6: H2.29 3185.25,3505.25 ccw(c3198,3492.54) 3180,3492.54 3180,3392.46 ccw(c3198,3392.46) 3185.22,3379.78 v2(3265,3300)
P36: H1.32 U1.35 | length 913.8
  Top Signal w6: H1.32 3080.25,2689.75 cw(c3093,2702.46) 3075,2702.46 3075,2777.54 cw(c3093,2777.54) 3080.25,2790.25 3139.75,2849.75 cw(c3152.46,2837) 3152.46,2855 3202.54,2855 ccw(c3202.54,2873) 3215.25,2860.25 3551.6,3196.6 cw(c3564.31,3183.85) 3564.31,3201.85 U1.35
P37: H1.31 U1.36 | length 704.6
  Top Signal w6: H1.31 3566.91,3176.91 cw(c3579.62,3164.16) 3579.62,3182.16 U1.36
P40: H2.19 U1.22 | length 708.1
  Top Signal w6: U1.22 3927.84,3286.49 3924.37,3281.74 cw(c3909.84,3292.37) 3922.59,3279.66 3922.25,3279.32 ccw(c3935,3266.62) 3917,3266.62 3917,3221.81 ccw(c3935,3221.81) 3922.25,3209.1 v1(3931.97,3199.38)
  Bottom Signal w6: H2.19 3685.25,3505.25 ccw(c3698,3492.54) 3680,3492.54 3680,3287.46 ccw(c3698,3287.46) 3685.25,3274.75 3719.75,3240.25 ccw(c3732.46,3253) 3732.46,3235 3901.84,3235 cw(c3901.84,3217) 3919.57,3220.11 3920.09,3217.18 ccw(c3937.84,3220.16) 3925.12,3207.42 3927.76,3204.78 cw(c3915.03,3192.06) 3929.53,3202.72 3931.6,3199.9 cw(c3917.1,3189.24) 3931.92,3199.46 v1(3931.97,3199.38)
P41: H1.30 U1.41 | length 838.9
  Top Signal w6: U1.41 3652.89,3083.74 cw(c3657.61,3066.37) 3657.55,3084.37 3725.29,3084.37 ccw(c3725.28,3102.37) v1(3730,3085)
  Bottom Signal w6: H1.30 3274.75,2684.75 ccw(c3262,2697.46) 3280,2697.46 3280,2817.54 cw(c3298,2817.54) 3285.25,2830.25 3534.75,3079.75 cw(c3547.46,3067) 3547.46,3085 v1(3730,3085)
P42: H1.24 U1.42 | length 551.3
  Top Signal w6: v2(3520,2965) 3520,2972.54 cw(c3538,2972.54) 3525.25,2985.25 3598.46,3058.46 cw(c3611.16,3045.7) 3611.16,3063.7 3648.4,3063.7 ccw(c3648.4,3081.7) 3651.89,3064.05 U1.42
  Bottom Signal w6: v2(3520,2965) 3485.25,2930.25 ccw(c3498,2917.54) 3480,2917.54 3480,2677.46 ccw(c3498,2677.46) 3485.25,2664.75 3494.61,2655.39 ccw(c3507.32,2668.14) 3507.32,2650.14 3512.4,2650.14 cw(c3512.4,2632.14) 3525.11,2644.89 H1.24
P43: H1.9 U1.43 | length 703.9
  Top Signal w6: U1.43 3920.6,3044.37 cw(c3920.6,3026.37) 3933.35,3039.07 4065.51,2906.92 cw(c4052.78,2894.19) 4067.35,2904.76 4072.05,2898.28 ccw(c4086.66,2908.8) 4073.91,2896.09 H1.9
P44: H2.13 U1.44 | length 807.7
  Top Signal w6: U1.44 3736.62,3024.68 ccw(c3736.62,3042.68) v1(3740,3025)
  Bottom Signal w6: v1(3740,3025) 3782.54,3025 ccw(c3782.54,3043) 3795.25,3030.25 3916.63,3151.63 cw(c3929.33,3138.88) 3929.33,3156.88 3938.59,3156.88 ccw(c3938.59,3174.88) 3951.3,3162.12 3961.3,3172.12 ccw(c3948.54,3184.83) 3966.54,3184.83 3966.54,3200.46 cw(c3984.54,3200.46) 3971.79,3213.16 4035.16,3276.52 ccw(c4022.4,3289.23) 4040.4,3289.23 4040.4,3299.92 cw(c4058.4,3299.92) 4045.65,3312.62 4052.75,3319.72 ccw(c4040,3332.43) 4057.96,3331.27 cw(c4075.92,3330.02) 4062.93,3342.48 ccw(c4050,3355) 4068,3355 4068,3388.28 cw(c4086,3388.28) 4073.25,3400.99 4074.75,3402.49 ccw(c4062,3415.2) 4080,3415.2 4080,3492.54 ccw(c4062,3492.54) 4074.73,3505.27 H2.13
P45: H1.2 U1.57 | length 1033.4
  Top Signal w6: v1(3870,2930) 3870,2928 ccw(c3888,2928) 3875.32,2915.23 3879.27,2911.27 cw(c3868.79,2900.67) 3879.4,2911.15 3883.2,2907.35 cw(c3870.47,2894.62) 3884.81,2905.5 3888.47,2900.67 U1.57
  Bottom Signal w6: v1(3870,2930) 3880.03,2940.03 cw(c3892.73,2927.28) 3892.73,2945.28 4007.27,2945.28 cw(c4007.27,2927.28) 4019.97,2940.03 4044.75,2915.25 cw(c4032,2902.54) 4050,2902.54 4050,2842.46 ccw(c4068,2842.46) 4055.25,2829.75 4091.75,2793.25 ccw(c4104.46,2806) 4104.46,2788 4349.54,2788 cw(c4349.54,2770) 4362.25,2782.75 4374.75,2770.25 cw(c4362,2757.54) 4380,2757.54 4380,2712.46 ccw(c4398,2712.46) 4385.25,2699.75 4389.75,2695.25 ccw(c4402.46,2708) 4402.46,2690 4572.54,2690 cw(c4572.54,2672) 4585.27,2684.73 H1.2
P46: H1.1 U1.58 | length 964
  Top Signal w6: U1.58 3908.16,2900.67 3904.49,2905.5 ccw(c3890.16,2894.61) 3902.89,2907.34 3899.07,2911.16 ccw(c3888.47,2900.67) 3898.95,2911.27 3897.98,2912.25 cw(c3910.68,2925) 3892.68,2925 3892.68,2935.22 cw(c3910.68,2935.22) 3897.93,2947.93 v1(3920,2970)
  Bottom Signal w6: v1(3920,2970) 4002.54,2970 cw(c4002.54,2952) 4015.27,2964.73 4059.73,2920.27 cw(c4047,2907.54) 4065,2907.54 4065,2847.52 ccw(c4083,2847.46) 4070.25,2834.75 4099.78,2805.22 ccw(c4112.46,2818) 4112.46,2800 4562.54,2800 cw(c4562.54,2782) 4575.27,2794.73 4601.5,2768.5 H1.1
P47: H2.20 U1.11 | length 694.5
  Top Signal w6: H2.20 3775.2,3404.8 ccw(c3787.91,3417.55) 3787.91,3399.55 3813,3399.55 cw(c3813,3381.55) 3825.85,3394.15 3841.73,3378.27 ccw(c3854.46,3391) 3854.46,3373 4064.54,3373 cw(c4064.54,3355) 4077.3,3367.7 4100.75,3344.25 cw(c4088,3331.54) 4106,3331.54 4106,3304.22 cw(c4088,3304.22) 4100.75,3291.52 4047.25,3238.01 ccw(c4060,3225.31) 4042,3225.31 4042,3160.79 ccw(c4060,3160.79) 4060,3142.79 U1.11
P50: H2.32 U1.32 | length 726.4
  Top Signal w6: H2.32 3215.2,3364.8 ccw(c3227.91,3377.55) 3227.91,3359.55 3318,3359.55 cw(c3318,3341.55) 3330.72,3354.28 3419.58,3265.42 cw(c3406.92,3252.62) 3419.75,3265.25 ccw(c3432.46,3278) 3432.46,3260 3707.54,3260 ccw(c3707.54,3278) 3720.24,3265.24 3725.74,3270.74 ccw(c3712.99,3283.45) 3730.99,3283.45 U1.32
P51: H2.31 U1.33 | length 824.8
  Top Signal w6: H2.31 3126.09,3550 ccw(c3126.09,3532) 3113.39,3544.75 3078.88,3510.24 ccw(c3091.64,3497.54) 3073.64,3497.54 3073.64,3398.82 ccw(c3091.64,3398.82) 3078.88,3386.12 3124.75,3340.25 ccw(c3137.46,3353) 3137.46,3335 3307.54,3335 cw(c3307.54,3317) 3320.27,3329.73 3403.53,3246.47 ccw(c3416.24,3259.22) 3416.24,3241.22 U1.33
P52: H2.4 U1.64 | length 1163.8
  Top Signal w6: v1(3895,3010) 3938,3010 cw(c3938,2992) 3950.7,3004.75 4021.02,2934.43 cw(c4008.27,2921.73) 4026.27,2921.73 4026.27,2900.67 U1.64
  Bottom Signal w6: v1(3895,3010) 3895,3102.09 cw(c3913,3102.09) 3900.24,3114.79 3925.08,3139.63 cw(c3937.79,3126.88) 3937.79,3144.88 3943.56,3144.88 ccw(c3943.56,3162.88) 3956.26,3150.12 3957.07,3150.93 cw(c3969.78,3138.18) 3969.78,3156.18 3991.72,3156.18 ccw(c3991.72,3174.18) 4004.42,3161.42 4084.74,3241.75 cw(c4097.45,3229) 4097.45,3247 4199.54,3247 ccw(c4199.54,3265) 4212.24,3252.24 4379.75,3419.75 ccw(c4367,3432.46) 4385,3432.46 4385,3469.03 cw(c4403,3469.03) 4390.24,3481.73 4403.27,3494.75 cw(c4415.97,3482) 4415.97,3500 4472.54,3500 cw(c4472.54,3482) 4485.27,3494.73 H2.4
P53: H2.6 U1.1 | length 937.4
  Top Signal w6: v1(4025,2990) 4025.06,2989.97 cw(c4016.49,2974.14) 4029.22,2986.86 4036.13,2979.95 4064.9,2951.19 ccw(c4077.6,2963.94) 4066.75,2949.58 4071.54,2945.94 U1.1
  Bottom Signal w6: v1(4025,2990) 3970.26,3044.74 ccw(c3957.54,3032) 3957.54,3050 3937.46,3050 cw(c3937.46,3068) 3924.75,3055.25 3917.25,3062.75 cw(c3930,3075.46) 3912,3075.46 3912,3102.12 cw(c3930,3102.12) 3917.24,3114.82 3930.05,3127.63 cw(c3942.76,3114.88) 3942.76,3132.88 3995.42,3132.88 ccw(c3995.42,3150.88) 4008.12,3138.12 4084.75,3214.75 cw(c4097.46,3202) 4097.46,3220 4192.54,3220 ccw(c4192.54,3238) 4205.24,3225.24 H2.6
P54: C2.2 H2.17 R1.1 SW1.2 U1.18 | length 2534.4
  Top Signal w6: v1(3780,3110) 3822.75,3067.25 ccw(c3835.46,3080) 3835.46,3062 3934.54,3062 ccw(c3934.54,3080) 3947.25,3067.25 3956.47,3076.47 ccw(c3943.72,3089.17) 3961.72,3089.17 3961.72,3208.74 cw(c3979.72,3208.74) 3966.96,3221.44 4001.33,3255.81 ccw(c3988.58,3268.52) 4006.58,3268.52 U1.18
  Top Signal w10: SW1.2 3195,3212.43 ccw(c3225,3212.43) 3203.77,3191.23 v2(3220,3175)
  Bottom Signal w6: v1(3780,3110) 3517.45,3110 cw(c3517.45,3128) 3509.85,3111.68 ccw(c3502.25,3095.37) 3509.73,3111.74 3504.07,3114.34 ccw(c3496.54,3097.99) 3496.54,3115.99 3237.54,3115.99 3224.66,3128.87 R1.1 3224.66,3131.13 3211.78,3144.01 3065.25,3290.54 cw(c3078,3303.25) 3060,3303.25 3060,3562.54 cw(c3078,3562.54) 3065.24,3575.24 3084.75,3594.75 cw(c3097.46,3582) 3097.46,3600 3772.54,3600 cw(c3772.54,3582) 3785.27,3594.73 H2.17
  Bottom Signal w10: v2(3220,3175) 3220.03,3174.95 cw(c3194.66,3158.94) 3224.66,3158.79 3224.66,3142.01 R1.1@3224.66,3131.13 ; C2.2 3222.56,3117.99 R1.1
P60: H2.10 U1.5 | length 642.8
  Top Signal w6: v1(3984.54,3200.46) cw(c3967.22,3205.34) 3979.97,3192.64 3978.96,3191.63 ccw(c3991.72,3178.93) 3973.72,3178.93 3973.72,3063.74 ccw(c3991.72,3063.74) 3978.96,3051.04 4000.07,3029.93 ccw(c4012.78,3042.68) 4012.78,3024.68 U1.5
  Bottom Signal w6: v1(3984.54,3200.46) 4037.08,3252.99 cw(c4049.79,3240.24) 4043.28,3257.03 4049.46,3259.42 ccw(c4043.05,3276.24) 4055.75,3263.48 4100.75,3308.49 ccw(c4088,3321.19) 4105.3,3316.2 4106.69,3321 cw(c4124,3316.04) 4111.25,3328.75 4225.77,3443.27 ccw(c4213.02,3455.98) H2.10
P61: H2.9 U1.6 | length 769.8
  Top Signal w6: v1(3991.72,3174.18) 3991.72,3078.62 ccw(c4009.72,3078.62) 3996.96,3065.92 4013.27,3049.62 ccw(c4025.97,3062.37) 4025.97,3044.37 U1.6
  Bottom Signal w6: v1(3991.72,3174.18) ccw(c3976.01,3182.98) 3993.09,3177.29 3994.97,3182.82 cw(c4012.01,3177.01) 3999.26,3189.72 4056.62,3247.08 cw(c4069.32,3234.32) 4057.45,3247.85 4060.57,3250.62 ccw(c4048.66,3264.12) 4061.36,3251.36 4115.9,3305.9 cw(c4128.6,3293.15) 4128.6,3311.15 4168.69,3311.15 ccw(c4168.69,3329.15) 4181.4,3316.4 4274.75,3409.75 ccw(c4262,3422.46) 4280,3422.46 4280,3492.54 ccw(c4262,3492.54) 4274.73,3505.27 H2.9
P62: H2.12 U1.7 | length 501.1
  Top Signal w6: v1(4058.4,3291.6) ccw(c4069.52,3277.44) 4056.81,3290.19 4020.25,3253.62 ccw(c4033,3240.92) 4015,3240.92 4015,3097.46 ccw(c4033,3097.46) 4020.25,3084.75 4035.7,3069.3 ccw(c4048.41,3082.05) 4048.41,3064.05 U1.7
  Bottom Signal w6: v1(4058.4,3291.6) 4058.43,3291.65 ccw(c4041.6,3298.03) 4059.6,3297.97 4059.6,3302.14 cw(c4077.6,3302.14) 4064.76,3314.76 4064.82,3314.82 ccw(c4052,3327.46) 4069.86,3325.18 4070.15,3327.45 cw(c4088,3325.12) 4074.78,3337.34 4075.23,3337.82 ccw(c4062,3350.03) 4080,3350.03 4080,3383.31 cw(c4098,3383.31) 4085.25,3396.02 4124.75,3435.52 ccw(c4112,3448.22) 4130,3448.22 H2.12
P63: H2.11 U1.8 | length 610.8
  Top Signal w6: v1(4088,3325) 4088,3303.19 cw(c4070,3303.19) 4082.75,3290.49 4035.25,3242.98 ccw(c4048,3230.28) 4030,3230.28 4030,3102.46 ccw(c4048,3102.46) 4035.25,3089.75 4036.01,3088.99 ccw(c4048.72,3101.74) 4048.72,3083.74 U1.8
  Bottom Signal w6: v1(4088,3325) cw(c4105.32,3320.12) 4090.9,3330.89 4092.44,3332.96 ccw(c4078,3343.7) 4095.28,3338.67 4096.72,3343.58 cw(c4114,3338.54) 4101.25,3351.25 4174.75,3424.75 ccw(c4162,3437.46) 4180,3437.46 4180,3492.54 ccw(c4162,3492.54) 4174.73,3505.27 H2.11
P64: H2.22 U1.23 | length 637.4
  Top Signal w6: U1.23 3908.16,3286.49 3908.14,3286.42 3906.1,3280.94 ccw(c3923,3274.73) 3905,3274.73 3905,3203.96 ccw(c3923,3203.96) 3907.53,3194.77 3909.83,3190.87 cw(c3894.33,3181.73) v1@3911.64,3186.64
  Bottom Signal w6: H2.22 3630,3262.46 ccw(c3648,3262.46) 3635.25,3249.75 3659.75,3225.25 ccw(c3672.46,3238) 3672.46,3220 3867.54,3220 cw(c3867.54,3202) 3880.35,3214.65 3890.26,3204.74 ccw(c3902.99,3217.47) 3893.62,3202.1 3901.06,3197.5 cw(c3891.6,3182.19) 3904.33,3194.91 3908.64,3190.6 cw(c3895.91,3177.88) v1@3911.63,3186.65
  other v1: 3911.65,3186.61
P65: H2.21 U1.24 | length 816.2
  Top Signal w6: U1.24 3888.47,3261.97 ccw(c3906.47,3261.97) 3889.43,3256.17 3892.06,3248.37 cw(c3875,3242.62) 3893,3242.62 3893,3177.15 ccw(c3911,3177.21) 3894.64,3169.71 v1(3894.66,3169.66)
  Bottom Signal w6: H2.21 ccw(c3632.65,3532.2) 3619.95,3544.95 3585.25,3510.25 ccw(c3598,3497.54) 3580,3497.54 3580,3262.46 ccw(c3598,3262.46) 3585.25,3249.75 3624.75,3210.25 ccw(c3637.46,3223) 3637.46,3205 3852.54,3205 cw(c3852.54,3187) 3865.27,3199.73 3891.35,3173.65 cw(c3878.62,3160.92) 3892.71,3172.12 3894.32,3170.1 cw(c3880.23,3158.9) 3894.61,3169.73 v1(3894.66,3169.66)
P66: H2.24 U1.25 | length 790.9
  Top Signal w6: U1.25 3868.79,3319.32 cw(c3851.39,3314.72) 3869.39,3314.72 3869.39,3163.06 ccw(c3887.39,3163.06) 3874.64,3150.36 v1(3882.27,3142.73)
  Bottom Signal w6: H2.24 3530,3232.46 ccw(c3548,3232.46) 3535.25,3219.75 3559.75,3195.25 ccw(c3572.46,3208) 3572.46,3190 3827.54,3190 cw(c3827.54,3172) 3840.27,3184.73 v1(3882.27,3142.73)
P67: H2.23 U1.26 | length 926.3
  Top Signal w6: U1.26 3849.1,3191.6 ccw(c3867.1,3191.6) 3850.7,3184.19 3853.4,3178.2 cw(c3837,3170.79) 3855,3170.79 v1(3855,3135)
  Bottom Signal w6: H2.23 3485.25,3505.25 ccw(c3498,3492.54) 3480,3492.54 3480,3257.43 ccw(c3498,3257.43) 3485.25,3244.72 3549.72,3180.25 ccw(c3562.43,3193) 3562.43,3175 3807.54,3175 cw(c3807.54,3157) 3820.27,3169.73 v1(3855,3135)
P70: H1.29 U1.37 | length 633.7
  Top Signal w6: H1.29 3230,2797.54 cw(c3248,2797.54) 3235.25,2810.25 3581.89,3156.89 cw(c3594.59,3144.13) 3594.59,3162.13 3648.4,3162.13 ccw(c3648.4,3180.13) 3651.89,3162.48 U1.37
P71: H1.28 U1.38 | length 707.1
  Top Signal w6: H1.28 3329.99,2640.05 ccw(c3312.2,2637.35) 3324.92,2650.08 3285.24,2689.76 cw(c3298,2702.46) 3280,2702.39 3280,2818.7 cw(c3298,2818.7) 3285.25,2831.41 3591.04,3137.2 cw(c3603.74,3124.44) 3603.74,3142.44 3648.4,3142.44 ccw(c3648.4,3160.44) 3651.89,3142.79 U1.38
P72: H1.27 U1.39 | length 543.7
  Top Signal w6: H1.27 3330,2842.54 cw(c3348,2842.54) 3335.25,2855.25 3597.52,3117.52 cw(c3610.22,3104.76) 3610.22,3122.76 3648.4,3122.76 ccw(c3648.4,3140.76) 3651.89,3123.11 U1.39
P73: H1.26 U1.40 | length 617.2
  Top Signal w6: H1.26 3385.25,2684.75 cw(c3398,2697.46) 3380,2697.46 3380,2862.54 cw(c3398,2862.54) 3385.25,2875.25 3607.83,3097.83 cw(c3620.53,3085.07) 3620.53,3103.07 3648.4,3103.07 ccw(c3648.4,3121.07) 3651.89,3103.42 U1.40
P74: H1.13 U1.53 | length 304
  Top Signal w6: U1.53 3809.73,2817.73 ccw(c3827.73,2817.73) 3814.98,2805.02 3834.26,2785.74 ccw(c3846.96,2798.5) 3846.96,2780.5 3982.05,2780.5 cw(c3982.05,2762.5) 3994.75,2775.25 H1.13
P75: H1.12 U1.54 | length 462.1
  Top Signal w6: U1.54 3829.42,2828.04 ccw(c3847.42,2828.04) 3834.67,2815.33 3852.26,2797.74 ccw(c3864.96,2810.5) 3864.96,2792.5 4045.05,2792.5 cw(c4045.05,2774.5) 4057.75,2787.25 4074.75,2770.25 cw(c4062,2757.54) 4080,2757.54 4080,2697.46 ccw(c4098,2697.46) 4085.25,2684.75 H1.12
P76: H1.11 U1.55 | length 355.3
  Top Signal w6: U1.55 3849.1,2866.59 cw(c3831.72,2861.92) 3849.72,2861.92 3849.72,2832.74 ccw(c3867.72,2832.74) 3854.97,2820.03 3865.26,2809.74 ccw(c3877.96,2822.5) 3877.96,2804.5 4058.05,2804.5 cw(c4058.05,2786.5) 4070.75,2799.25 H1.11 ccw(c4142.65,2752.8) H1.11
P77: H1.10 U1.56 | length 515.5
  Top Signal w6: U1.56 3868.79,2833.75 3872.45,2828.92 ccw(c3886.79,2839.8) 3874.04,2827.1 3879.39,2821.74 ccw(c3892.1,2834.5) 3892.1,2816.5 4111.05,2816.5 cw(c4111.05,2798.5) 4123.75,2811.25 4174.75,2760.25 cw(c4162,2747.54) 4180,2747.54 4180,2687.46 ccw(c4198,2687.46) 4185.25,2674.75 4214.75,2645.25 ccw(c4227.46,2658) 4227.46,2640 H1.10
UCAP: C1.1 H2.8 U1.17 | length 676.9
  Top Signal w10: v1(3985,3495) 4232.67,3495 cw(c4232.67,3465) 4253.88,3486.21 4274.73,3465.37 ccw(c4295.93,3486.59) 4295.93,3456.59 4311.23,3456.59 cw(c4311.23,3426.59) H2.8 ; U1.17 4026.27,3344.16 4027.11,3345 4040,3345 v1(4050,3355)
  Bottom Signal w10: C1.1 3967.72,3353.31 3977.62,3354.71 cw(c3981.81,3325) 3981.81,3355 v1(4050,3355) 3993.73,3411.27 cw(c4015,3432.43) 3985,3432.43 v1(3985,3495)
USB_N: P1.3 R6.1 | length 300.5
  Bottom Signal w10: R6.1 4385.54,3117.99 4385.61,3117.94 cw(c4369.76,3092.48) 4390.97,3113.69 4391.21,3113.45 4394.99,3109.67 ccw(c4402.06,3116.75) 4401.12,3106.79 4408.36,3106.11 ccw(c4411.1,3135.99) 4411.1,3105.99 4507.16,3105.99 cw(c4507.16,3055.99) 4509.44,3105.94 cw(c4507.16,3055.99) 4509.55,3105.93 4528.35,3105.03 ccw(c4529.72,3135) 4529.72,3105 4597.57,3105 ccw(c4597.57,3135) 4600.32,3105.13 4607.52,3105.79 ccw(c4606.6,3115.75) 4613.64,3108.64 P1.3
USB_P: P1.2 R5.1 | length 300.5
  Bottom Signal w10: R5.1 4385.54,3073.98 ccw(c4369.76,3099.5) 4390.91,3078.23 4395,3082.31 cw(c4402.07,3075.24) 4401.15,3085.2 4408.35,3085.86 cw(c4411.1,3055.99) 4411.1,3085.99 4507.16,3085.99 cw(c4507.16,3055.99) 4508.59,3085.95 4527.26,3085.06 cw(c4525.91,3055.09) 4527.43,3085.05 ccw(c4529.72,3135) 4529.54,3085 4597.57,3085 cw(c4597.57,3055) 4600.29,3084.88 4607.48,3084.22 cw(c4606.6,3074.26) 4613.67,3081.33 4618.79,3076.21 P1.2
VCC: C3.1 C4.1 C6.1 R2.1 U1.19 U1.20 U2.5 | length 427.1
  Top Signal w10: U1.20 3967.21,3280.09 ccw(c3997.21,3280.16) v1(3977.56,3257.5) ; v1@3974.45,3258.68 v1(3977.56,3257.5) ; U1.19 3986.9,3282.93 cw(c3956.9,3283.01) 3983.62,3269.38 v1(3977.56,3257.5)
  Bottom Signal w10: v1(3700,3290) 3700.07,3289.93 3731.27,3258.73 ccw(c3752.43,3280) 3752.43,3250 3835.84,3250 ccw(c3835.84,3280) 3845.31,3251.53 3858.51,3255.95 cw(c3868.02,3227.5) 3868.02,3257.5 v1(3977.56,3257.5)
  other v1: 4300,2900 4325,2900 4265,2940 4235,2985 4210,3130 4210,3150 3700,3315

## Polygon pours and split planes (outlines as drawn)
GND on Bottom Signal "GND_L04_P009" (solid, remove dead copper, pour order 9): 3053.23,2642.24 ccw(c3131.97,2642.24) 3131.97,2563.5 4628.03,2563.5 ccw(c4628.03,2642.24) 4706.77,2642.24 4706.77,3547.76 ccw(c4628.03,3547.76) 4628.03,3626.5 3131.97,3626.5 ccw(c3131.97,3547.76) 3053.23,3547.76
5V on Bottom Signal "5V_L04_P000" (solid, remove dead copper, pour order 0): 4615,2980 4615,2860 4435,2860 4435,2870 4360,2870 4360,2915 4425,2915 4425,2950 4345,2950 4345,2815 4690,2815 4690,2980
VCC on Bottom Signal "VCC_L04_P002" (solid, remove dead copper, pour order 2): 4205,3005 4205,2885 4335,2885 4335,3005
VCC on Bottom Signal "VCC_L04_P004" (solid, remove dead copper, pour order 4): 4335,3220 4265,3220 4200,3155 4200,3115 4235,3115 4235,3135 4275,3175 4335,3175
VCC on Bottom Signal "VCC_L04_P003" (solid, remove dead copper, pour order 3): 3900,3360 3900,3325 3720,3325 3720,3275 3695,3275 3690,3280 3690,3360
GND on Top Signal "GND_L01_P010" (solid, remove dead copper, pour order 10): 3053.23,2642.24 ccw(c3131.97,2642.24) 3131.97,2563.5 4628.03,2563.5 ccw(c4628.03,2642.24) 4706.77,2642.24 4706.77,3547.76 ccw(c4628.03,3547.76) 4628.03,3626.5 3131.97,3626.5 ccw(c3131.97,3547.76) 3053.23,3547.76
VCC on POWER (split plane): 4234.9,3010 4235.29,3008.05 4236.4,3006.4 4238.05,3005.29 4240,3004.9 4349.9,3004.9 4349.9,2583.6 3131.97,2583.6 3131.39,2583.54 3125.39,2583.88 3118.9,2584.98 3112.57,2586.81 3106.49,2589.33 3100.72,2592.51 3095.35,2596.33 3090.44,2600.71 3086.05,2605.62 3082.24,2611 3079.05,2616.76 3076.53,2622.85 3074.71,2629.17 3073.61,2635.67 3073.27,2641.67 3073.33,2642.24 3073.33,3099.9 3300,3099.9 3301.95,3100.29 3303.6,3101.4 3304.71,3103.05 3305.1,3105 3305.1,3389.9 4234.9,3389.9
5V on POWER (split plane): 4634.61,3606.12 4641.1,3605.02 4647.43,3603.19 4653.51,3600.67 4659.28,3597.49 4664.65,3593.67 4669.56,3589.29 4673.95,3584.38 4677.76,3579 4680.95,3573.24 4683.47,3567.15 4685.29,3560.83 4686.39,3554.33 4686.73,3548.33 4686.67,3547.76 4686.67,2642.24 4686.73,2641.67 4686.39,2635.67 4685.29,2629.17 4683.47,2622.85 4680.95,2616.76 4677.76,2611 4673.95,2605.62 4669.56,2600.71 4664.65,2596.33 4659.28,2592.51 4653.51,2589.33 4647.43,2586.81 4641.1,2584.98 4634.61,2583.88 4628.61,2583.54 4628.03,2583.6 4360.1,2583.6 4360.1,3010 4359.71,3011.95 4358.6,3013.6 4356.95,3014.71 4355,3015.1 4245.1,3015.1 4245.1,3395 4244.71,3396.95 4243.6,3398.6 4241.95,3399.71 4240,3400.1 3300,3400.1 3298.05,3399.71 3296.4,3398.6 3295.29,3396.95 3294.9,3395 3294.9,3110.1 3073.33,3110.1 3073.33,3547.76 3073.27,3548.33 3073.61,3554.33 3074.71,3560.83 3076.53,3567.15 3079.05,3573.24 3082.24,3579 3086.05,3584.38 3090.44,3589.29 3095.35,3593.67 3100.72,3597.49 3106.49,3600.67 3112.57,3603.19 3118.9,3605.02 3125.39,3606.12 3131.39,3606.46 3131.97,3606.4 4628.03,3606.4 4628.61,3606.46
GND on GND (split plane): 4634.61,3606.12 4641.1,3605.02 4647.43,3603.19 4653.51,3600.67 4659.28,3597.49 4664.65,3593.67 4669.56,3589.29 4673.95,3584.38 4677.76,3579 4680.95,3573.24 4683.47,3567.15 4685.29,3560.83 4686.39,3554.33 4686.73,3548.33 4686.67,3547.76 4686.67,2642.24 4686.73,2641.67 4686.39,2635.67 4685.29,2629.17 4683.47,2622.85 4680.95,2616.76 4677.76,2611 4673.95,2605.62 4669.56,2600.71 4664.65,2596.33 4659.28,2592.51 4653.51,2589.33 4647.43,2586.81 4641.1,2584.98 4634.61,2583.88 4628.61,2583.54 4628.03,2583.6 3131.97,2583.6 3131.39,2583.54 3125.39,2583.88 3118.9,2584.98 3112.57,2586.81 3106.49,2589.33 3100.72,2592.51 3095.35,2596.33 3090.44,2600.71 3086.05,2605.62 3082.24,2611 3079.05,2616.76 3076.53,2622.85 3074.71,2629.17 3073.61,2635.67 3073.27,2641.67 3073.33,2642.24 3073.33,3547.76 3073.27,3548.33 3073.61,3554.33 3074.71,3560.83 3076.53,3567.15 3079.05,3573.24 3082.24,3579 3086.05,3584.38 3090.44,3589.29 3095.35,3593.67 3100.72,3597.49 3106.49,3600.67 3112.57,3603.19 3118.9,3605.02 3125.39,3606.12 3131.39,3606.46 3131.97,3606.4 4628.03,3606.4 4628.61,3606.46

## Other copper
POWER (plane layer: these items are gaps in the copper):
  lines w10: 3050,3105 3300,3105 3300,3395 4240,3395 4240,3010 4355,3010 4355,2565

## Silkscreen, mask and mechanical layers (free items; w line width, h text height)
Top Overlay:
  lines w10: 4705,2640 4705,3092.76 ; 4705,3095 4705,3547.76
  text "POWER" at 4330,3325.78 h70
  text "STC32G12K128" at 3065,3321.11 h100
  text "GND" at 4460,3195.78 h70
  text "P31" at 4470,3120.78 h70
  text "P30" at 4470,3025.78 h70
  text "5V" at 4470,2920.78 h70
Mechanical 1:
  the board outline again, w0.5